# EAGLE board Putri Shaqila_espcam (EAGLE 9.6.2)
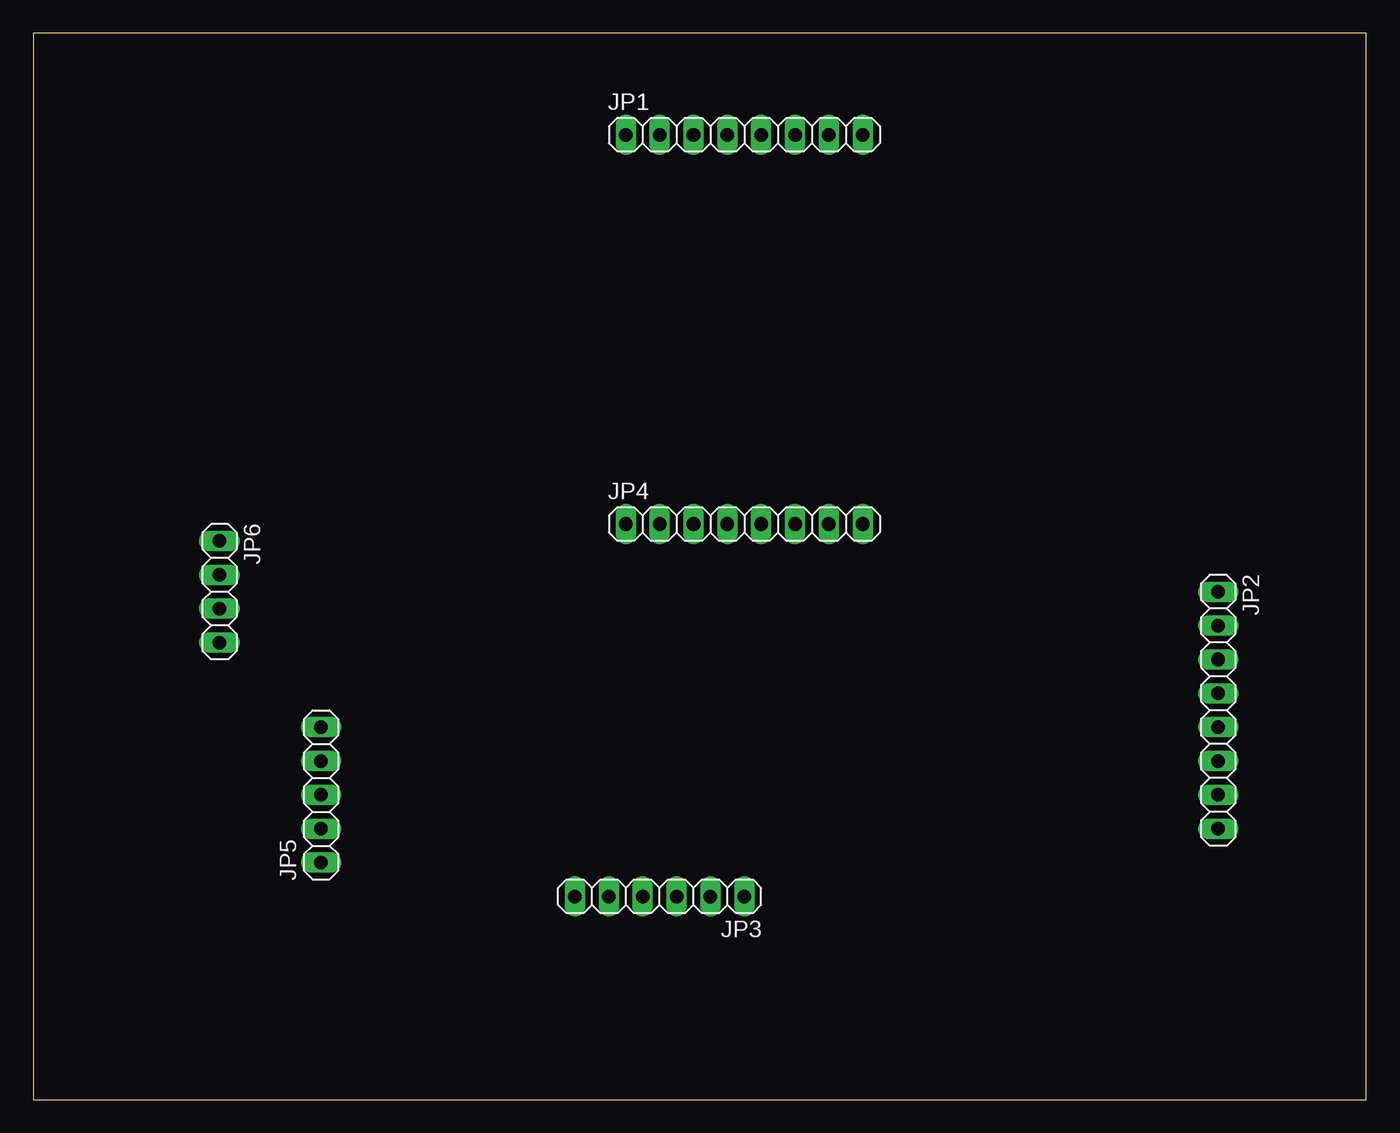
[diagram p0: board, top side]
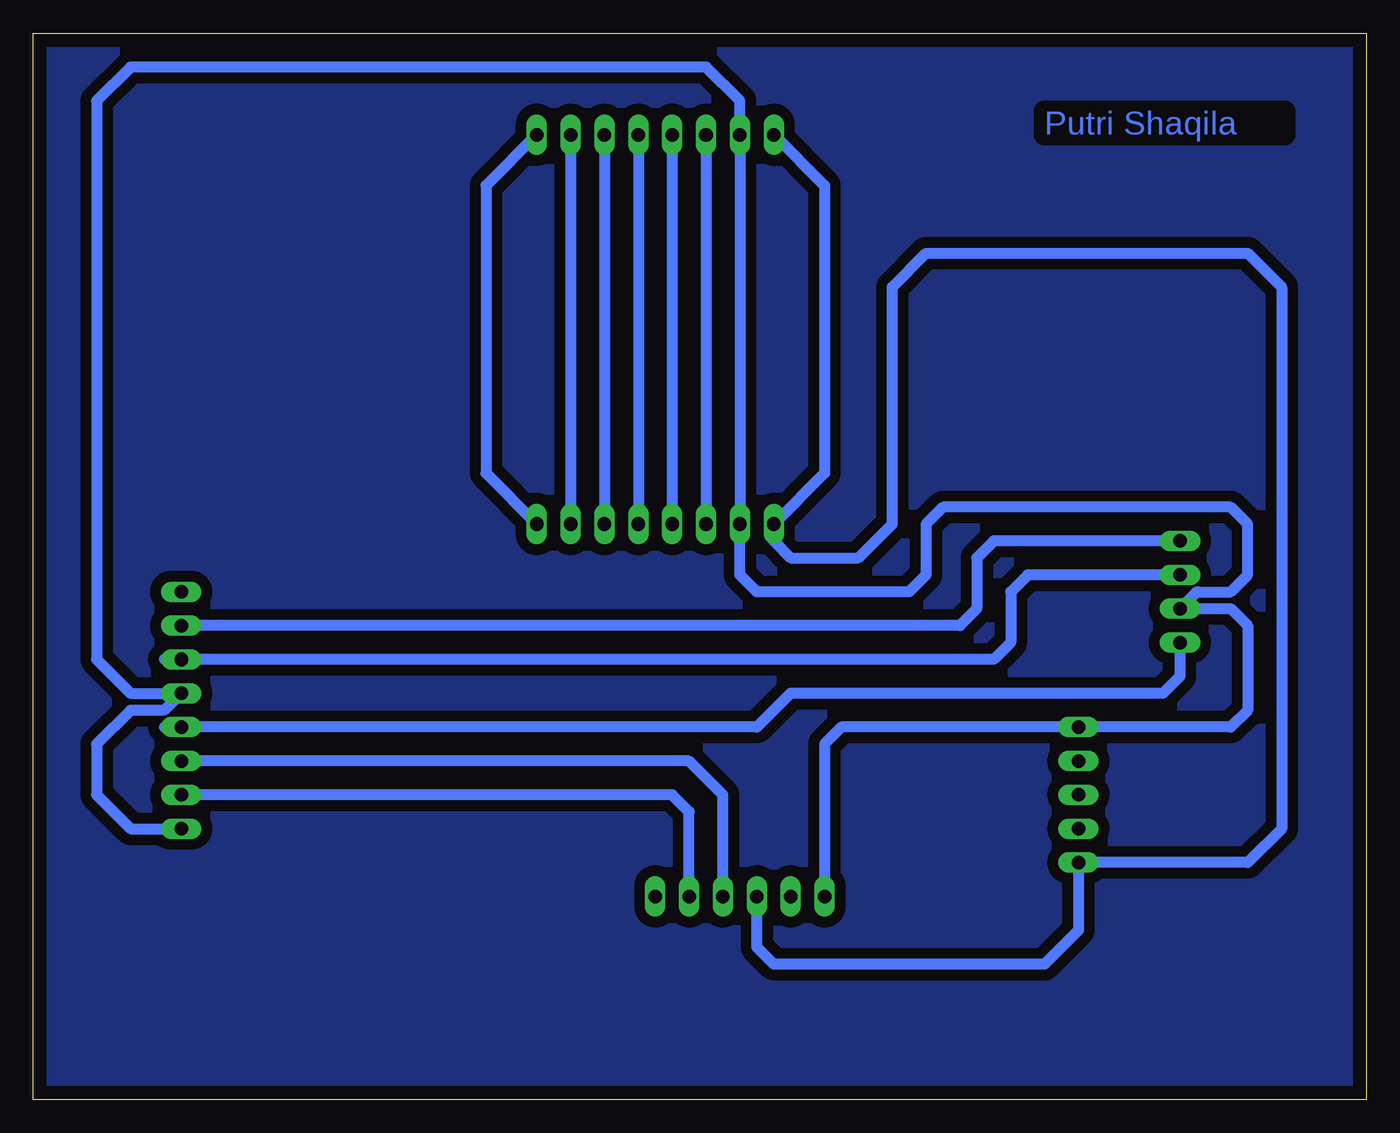
[diagram p1: board, bottom side, seen from below]

Size 100 x 80 mm. Coordinates in mm from the lower left corner, seen from the top.
Outline: 0,0 100,0 100,80 0,80 0,0
Copper layers (1*16): Top 0.035mm / dielectric 1.5mm / Bottom 0.035mm
Design rules "default": minimum track width 6mil, minimum drill 0.35mm, track to track 6mil, track to pad 6mil, pad to pad 6mil, via to via 6mil, smd to smd 6mil, copper to edge 40mil, drill to drill 6mil, minimum pad ring 10mil, minimum via ring 8mil, stop-mask expansion 4mil, vias tented up to drill 0mil, thermal gap 10mil

## Footprints (pad centres in the part's own frame; a part is rotated, then mirrored left to right if it is on the bottom)
1X08 = drill 1.016 long: 1 -8.89,0; 2 -6.35,0; 3 -3.81,0; 4 -1.27,0; 5 1.27,0; 6 3.81,0; 7 6.35,0; 8 8.89,0
1X06 = drill 1.016 long: 1 -6.35,0; 2 -3.81,0; 3 -1.27,0; 4 1.27,0; 5 3.81,0; 6 6.35,0
1X05 = drill 1.016 long: 1 -5.08,0; 2 -2.54,0; 3 0,0; 4 2.54,0; 5 5.08,0
1X04 = drill 1.016 long: 1 -3.81,0; 2 -1.27,0; 3 1.27,0; 4 3.81,0

## Placement (x,y rotation side)
JP1  [1X08]  53.34,72.39 0 top
JP2  [1X08]  88.9,29.21 270 top
JP3  [1X06]  46.99,15.24 180 top
JP4  [1X08]  53.34,43.18 0 top
JP5  [1X05]  21.59,22.86 90 top
JP6  [1X04]  13.97,38.1 270 top

## Library data of the parts
JP1-JP6 = pinhead

## Nets
3V3: JP2.1
5V: JP1.1 JP3.4 JP4.1 JP5.1
GND: JP1.2 JP2.4 JP2.8 JP3.6 JP4.2 JP5.5 JP6.3
IO0: JP2.3 JP6.2
IO2: JP1.7 JP4.7
IO4: JP1.8 JP4.8
IO12: JP1.3 JP4.3
IO13: JP1.4 JP4.4
IO14: JP1.6 JP4.6
IO15: JP1.5 JP4.5
IO16: JP2.2 JP6.1
RX: JP2.7 JP3.2
TX: JP2.6 JP3.3
VOUT: JP2.5 JP6.4

## Tracks (layer width: path | path; a pad name or v marks a point on that pad's centre or on a via)
5V
  Bottom 0.813: JP1.1 40.64,68.58 40.64,46.99 JP4.1 44.45,41.91 43.18,40.64 38.1,40.64 35.56,43.18 35.56,60.96 33.02,63.5 8.89,63.5 6.35,60.96 6.35,20.32 8.89,17.78 JP5.1 21.59,12.7 24.13,10.16 44.45,10.16 45.72,11.43 JP3.4
GND
  Bottom 0.813: JP3.6 40.64,26.67 39.37,27.94 JP5.5 10.16,27.94 8.89,29.21 8.89,35.56 10.16,36.83 JP6.3 12.75,38.05 12.66,38.05 12.61,38.1 10.16,38.1 8.89,39.37 8.89,43.18 10.16,44.45 31.75,44.45 33.02,43.18 33.02,39.37 34.29,38.1 45.72,38.1 46.99,39.37 JP4.2 JP1.2 46.99,74.93 49.53,77.47 92.71,77.47 95.25,74.93 95.25,33.02 92.71,30.48 JP2.4 90.12,29.26 90.21,29.26 90.26,29.21 92.71,29.21 95.25,26.67 95.25,22.86 92.71,20.32 JP2.8
IO0
  Bottom 0.813: JP6.2 25.4,39.37 26.67,38.1 26.67,34.29 27.94,33.02 JP2.3 90.17,33.02
IO2
  Bottom 0.813: JP1.7 JP4.7
IO4
  Bottom 0.813: JP4.8 66.04,46.99 66.04,68.58 JP1.8
IO12
  Bottom 0.813: JP1.3 JP4.3
IO13
  Bottom 0.813: JP1.4 JP4.4
IO14
  Bottom 0.813: JP1.6 JP4.6
IO15
  Bottom 0.813: JP1.5 JP4.5
IO16
  Bottom 0.813: JP6.1 27.94,41.91 29.21,40.64 29.21,36.83 30.48,35.56 JP2.2
N$1
  pour Bottom (isolate 0.813): 0,80.01 0,0 99.06,0 100.33,0 100.33,80.01
RX
  Bottom 0.813: JP3.2 50.8,21.59 52.07,22.86 JP2.7
TX
  Bottom 0.813: JP3.3 48.26,22.86 50.8,25.4 JP2.6
VOUT
  Bottom 0.813: JP6.4 13.97,31.75 15.24,30.48 43.18,30.48 45.72,27.94 JP2.5 90.17,27.94

## Text on the board
Bottom: Putri Shaqila